# EAGLE board ANAL_4_RELAY_REV_1_1 (EAGLE 8.6.3)
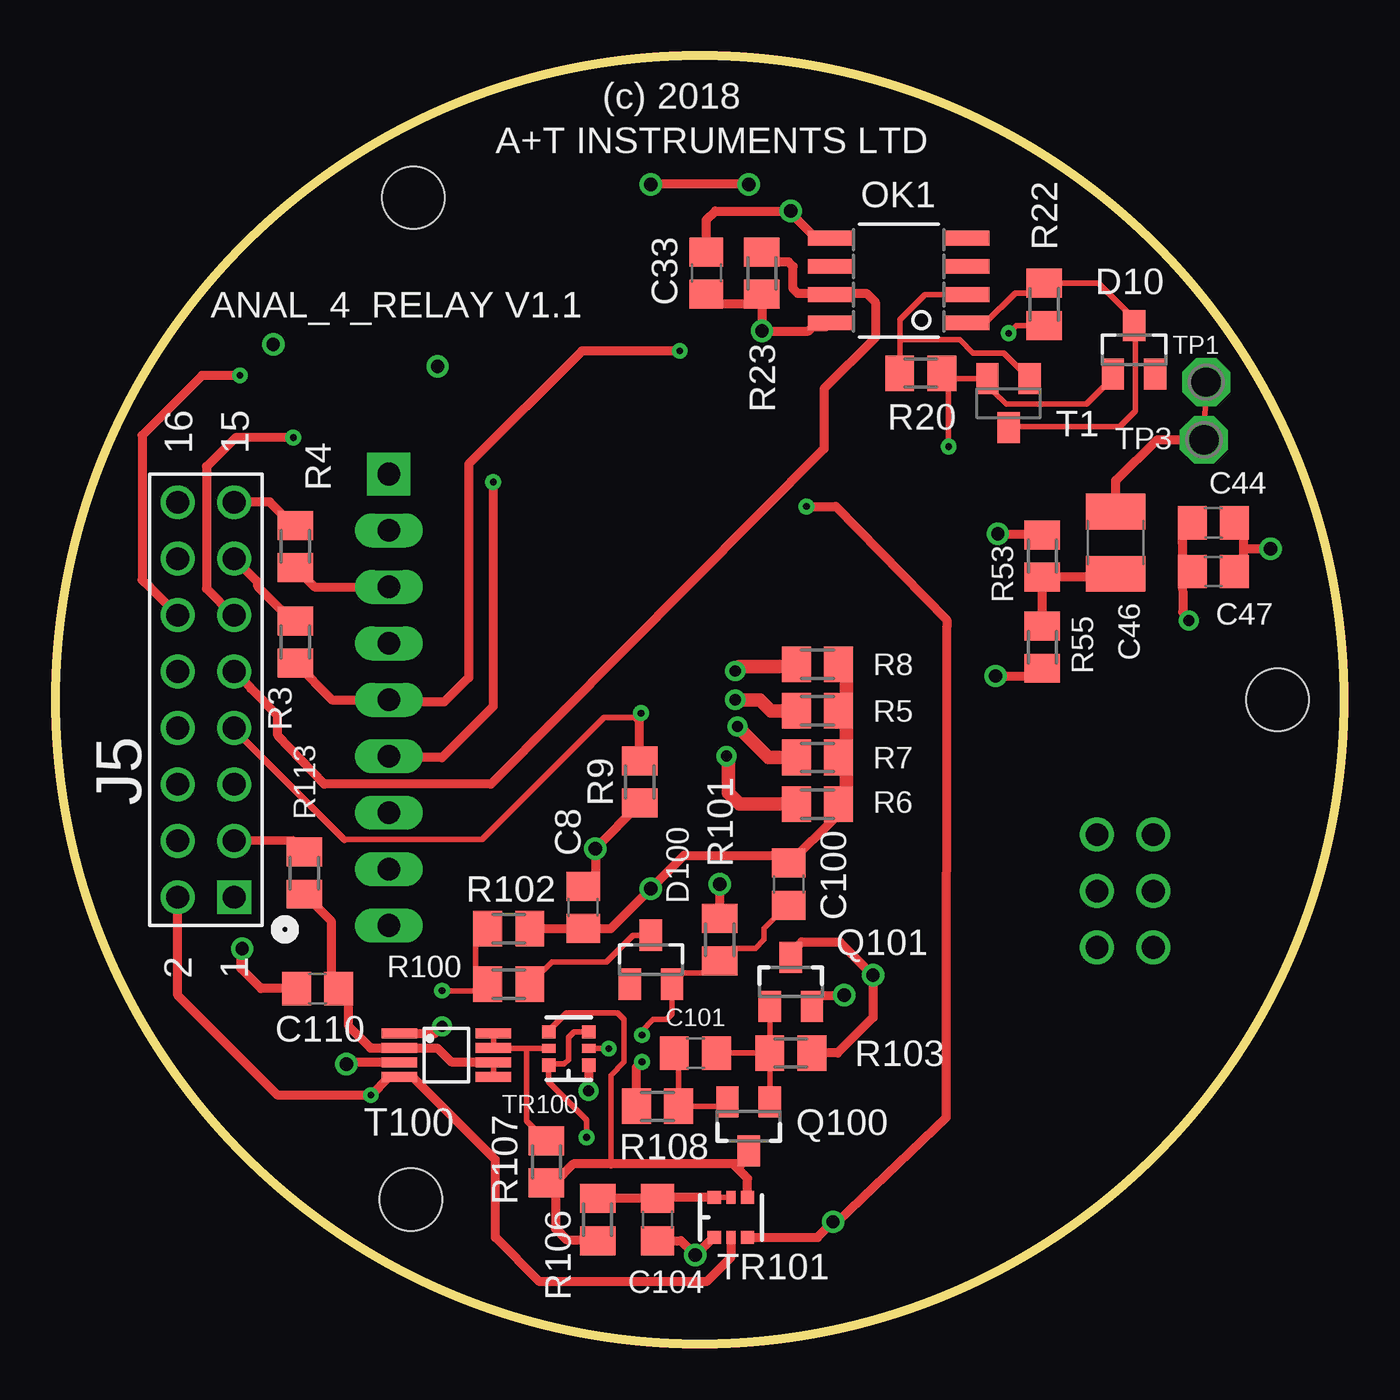
[diagram p0: board, top side]
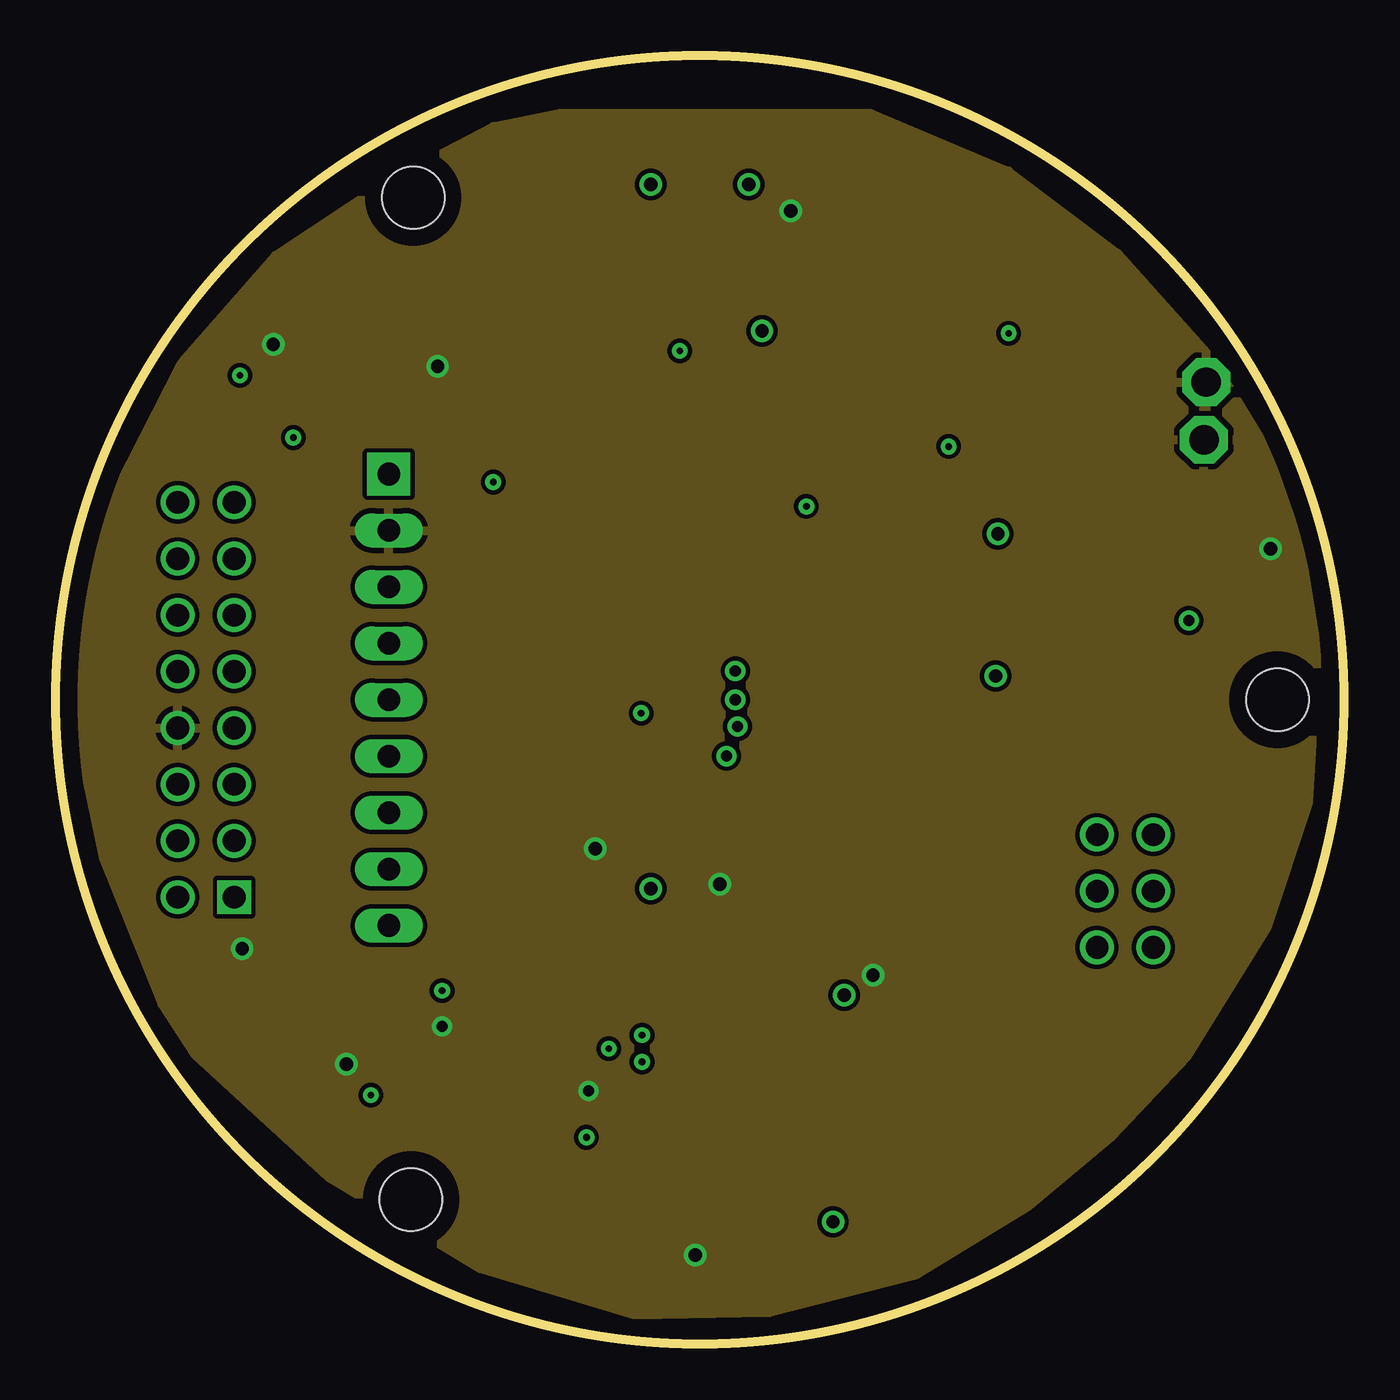
[diagram p1: board, inner layer GND]
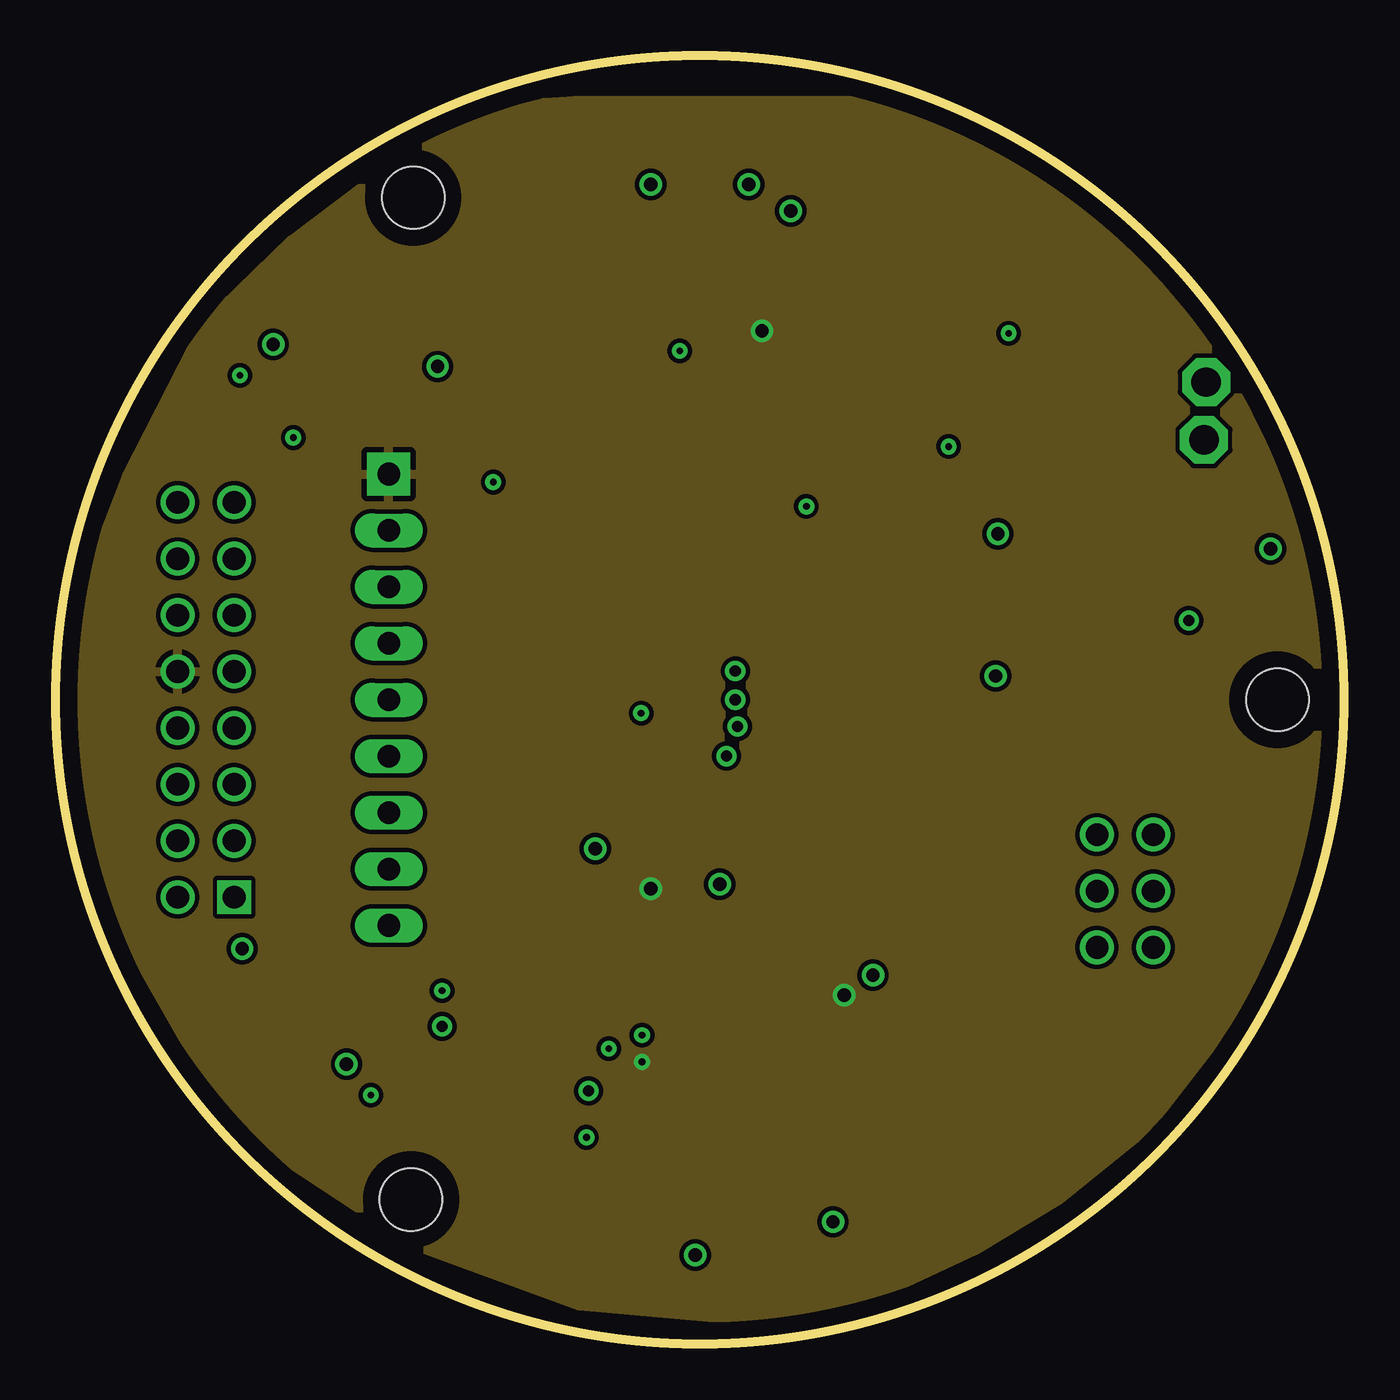
[diagram p2: board, inner layer 3V3&5V]
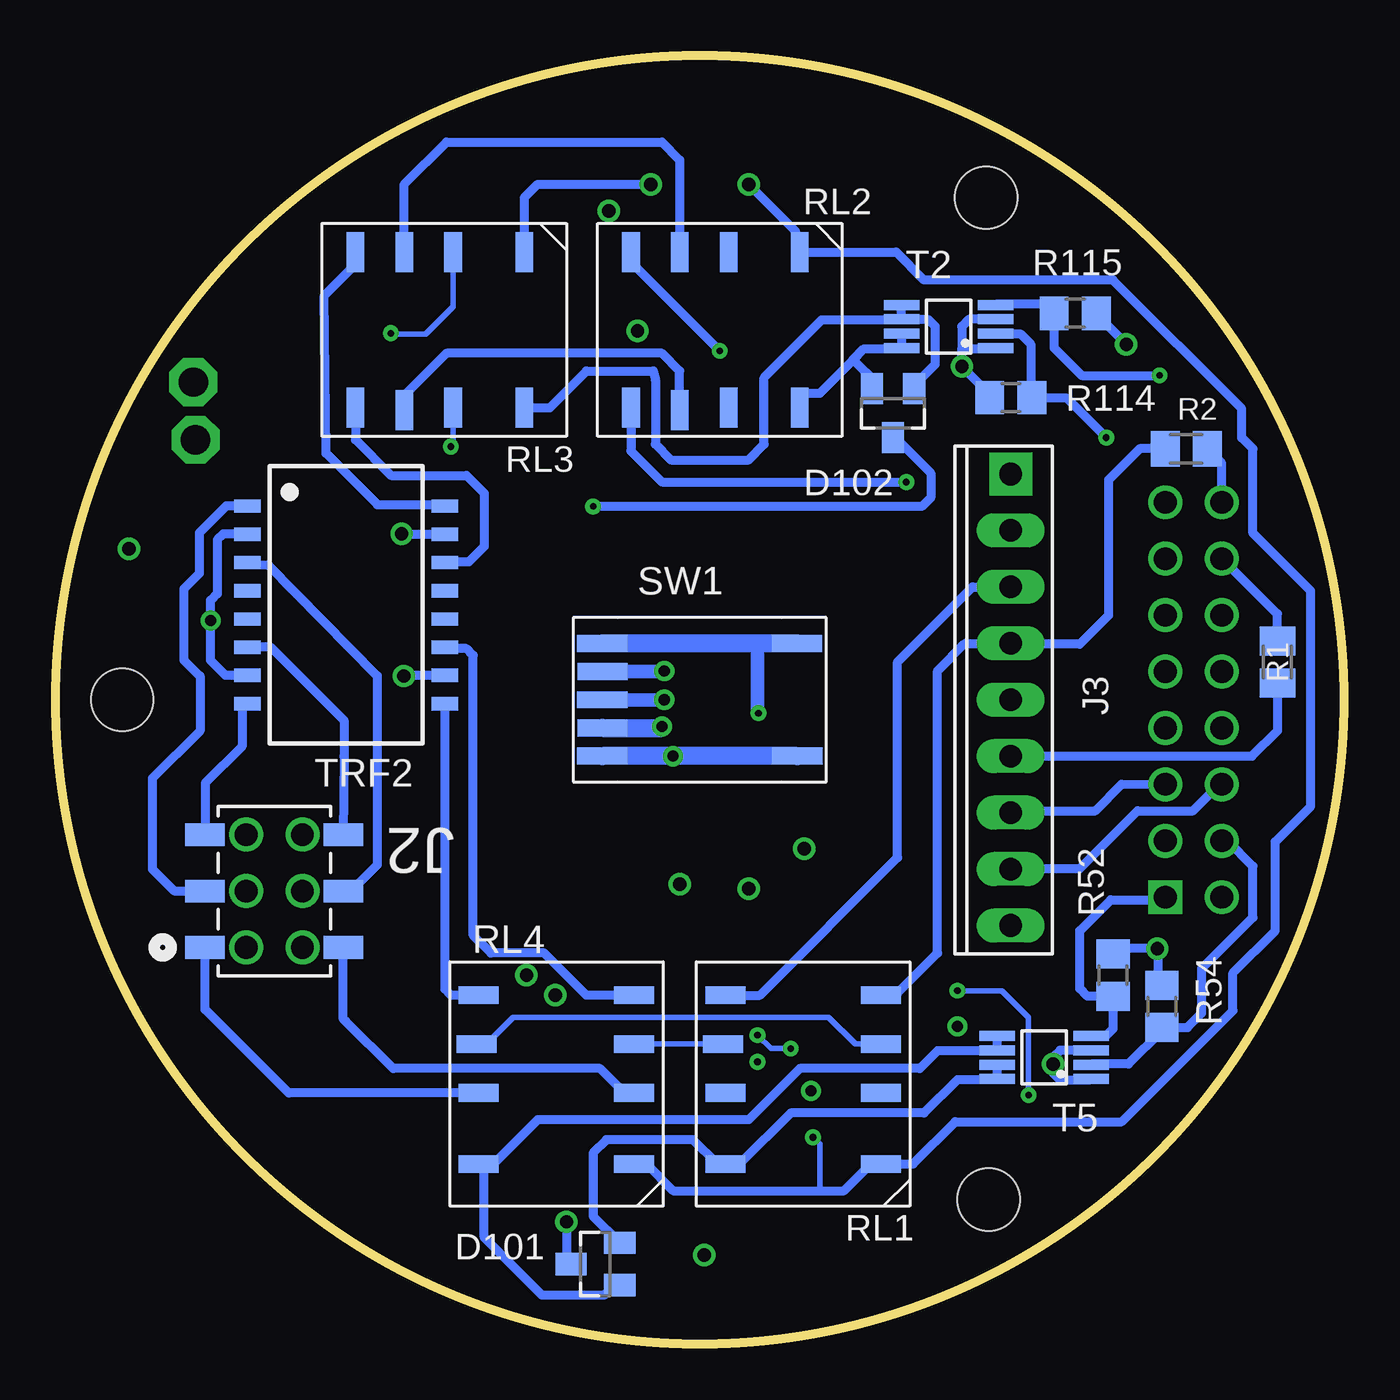
[diagram p3: board, bottom side, seen from below]

Size 58 x 58 mm. Coordinates in mm from the lower left corner, seen from the top.
Outline: circle at 29,29 radius 29
Copper layers (1*2*15*16): Top-VerticalRoutes 0.035mm / dielectric 0.5mm / GND 0.035mm / dielectric 0.5mm / 3V3&5V 0.035mm / dielectric 0.5mm / BottomnHorizontalroutes 0.035mm
Design rules "default *": minimum track width 0.2mm, minimum drill 0.3mm, track to track 6mil, track to pad 6mil, pad to pad 6mil, via to via 6mil, smd to smd 6mil, copper to edge 30mil, drill to drill 8mil, minimum pad ring 10mil, minimum via ring 8mil, stop-mask expansion 4mil, vias tented up to drill 0.31mm, thermal gap 10mil
Net classes: 0 default: width 0.2 mm, drill 0.2 mm, clearance 0.2 mm; 1 GND: width 0.2 mm, drill 0.2 mm, clearance 0.2 mm to class 0, clearance 0.2 mm; 2 5V: width 0.2 mm, drill 0.2 mm, clearance 0.2 mm to class 0, clearance 0.2 mm; 3 3v3: width 0.2 mm, drill 0.2 mm, clearance 0.2 mm to class 0, clearance 0.2 mm to class 1, clearance 0.2 mm to class 2, clearance 0.2 mm
Holes 2.8 mm at 55,29 16.1,51.6 16,6.5

## Footprints (pad centres in the part's own frame; a part is rotated, then mirrored left to right if it is on the bottom)
C0805 = smd 1.3 x 1.5: 1 -0.95,0; 2 0.95,0
C1210 = smd 1.6 x 2.7: 1 -1.4,0; 2 1.4,0
SOT23 = smd 1 x 1.4: 1 -0.95,-1.1; 2 0.95,-1.1; 3 0,1.1
CONN-6WAY-DV-BE = smd 1.016 x 1.778: 1 22.86,-6.223; 2 22.86,0; 3 20.32,-6.223; 4 20.32,0; 5 17.78,-6.223; 6 17.78,0 | drill 1.016: 7 22.86,-4.369; 8 22.86,-1.829; 9 20.32,-4.369; 10 20.32,-1.829; 11 17.78,-4.369; 12 17.78,-1.829
10X09MTA = drill 1.016 pad 1.93 square: 1 10.16,0 | drill 1.016 long: 2 7.62,0; 3 5.08,0; 4 2.54,0; 5 0,0; 6 -2.54,0; 7 -5.08,0; 8 -7.62,0; 9 -10.16,0
SAMTEC_TSW-108-14-L-D = drill 1.016 square: 1 -17.78,-2.54 | drill 1.016: 2 -17.78,0; 3 -15.24,-2.54; 4 -15.24,0; 5 -12.7,-2.54; 6 -12.7,0; 7 -10.16,-2.54; 8 -10.16,0; 9 -7.62,-2.54; 10 -7.62,0; 11 -5.08,-2.54; 12 -5.08,0; 13 -2.54,-2.54; 14 -2.54,0; 15 0,-2.54; 16 0,0
SOIC08 = smd 0.66 x 2.032: 1 -1.905,-3.073; 2 -0.635,-3.073; 3 0.635,-3.073; 4 1.905,-3.073; 5 1.905,3.073; 6 0.635,3.073; 7 -0.635,3.073; 8 -1.905,3.073
M0805 = smd 1.3 x 1.6: 1 -0.95,0; 2 0.95,0
R0805 = smd 1.3 x 1.5: 1 -0.95,0; 2 0.95,0
OMRON-G6K-2F = smd 0.8 x 1.8: 1 -3.6,-3.5; 2 -0.4,-3.5; 3 1.8,-3.5; 4 4,-3.5; 5 4,3.5; 6 1.8,3.6; 7 -0.4,3.5; 8 -3.6,3.5
10_WAY_ROTARY_MCR7 = smd 2.261 x 0.762: 1 -4.378,1.27; 2 -4.378,-1.27; 4_1 -4.385,-2.54; 4_2 4.385,-2.54; 8 -4.385,0; C1 -4.385,2.54; C2 4.378,2.54
SOT23-BEC = smd 1 x 1.4: B -0.95,-1.1; C 0,1.1; E 0.95,-1.1
SOP65P490X110-8L40N = smd 0.45 x 1.59: 1 -0.975,-2.115; 2 -0.325,-2.115; 3 0.325,-2.115; 4 0.975,-2.115; 5 0.975,2.115; 6 0.325,2.115; 7 -0.325,2.115; 8 -0.975,2.115
P1-13 = drill 1.321 pad 2.159 octagon: TP 0,0
SOT363(SC-88) = smd 0.6 x 0.6: 1 -0.9,0.75; 3 -0.9,-0.75; 4 0.9,-0.75; 6 0.9,0.75 | smd 0.6 x 0.4: 2 -0.9,0; 5 0.9,0
N5 = smd 0.6 x 1.2: 1 -4.445,-4.445; 2 -3.175,-4.445; 3 -1.905,-4.445; 4 -0.635,-4.445; 5 0.635,-4.445; 6 1.905,-4.445; 7 3.175,-4.445; 8 4.445,-4.445; 9 4.445,4.445; 10 3.175,4.445; 11 1.905,4.445; 12 0.635,4.445; 13 -0.635,4.445; 14 -1.905,4.445; 15 -3.175,4.445; 16 -4.445,4.445

## Placement (x,y rotation side)
C8  1u  [C0805]  23.75,19.65 90 top
C33  100n  [C0805]  29.3,48.2 90 top
C44  10n  [C0805]  52.12,36.97 0 top
C46  1n 2kV  [C1210]  47.72,36.07 90 top
C47  10n  [C0805]  52.12,34.77 0 top
C100  1u  [C0805]  33,20.7 270 top
C101  10N  [C0805]  28.8,13.1 0 top
C104  1u  [C0805]  27.1,5.6 270 top
C110  100n  [C0805]  11.8,16 180 top
D10  BAV199  [SOT23]  48.55,44.75 0 top
D100  BAT54A  [SOT23]  26.8,17.3 0 top
D101  BAT54A  [SOT23]  33.7,3.6 90 bottom
D102  BAT54A  [SOT23]  20.3,41.9 180 bottom
E$1  [PASS-ROUND]  -6,29 0 top  (outside the outline)
E$2  [PASS-ROUND]  29.4,63.7 0 top  (outside the outline)
E$3  [PASS-ROUND]  64.05,29 0 top  (outside the outline)
J2  TE 969973-3  [CONN-6WAY-DV-BE]  45.05,40.71 270 bottom
J3  B06-1X9-AG1-G  [10X09MTA]  15,29 90 bottom
J5  TSW-108-15-F-D  [SAMTEC_TSW-108-14-L-D]  5.5,37.89 90 top
OK1  HCPL0530  [SOIC08]  37.96,47.87 90 top
Q100  NTR2101P  [SOT23]  31.2,9.8 180 top
Q101  BC807  [SOT23]  33.1,16.3 0 top
R1  100k_0.1%  [M0805]  3,30.7 270 bottom
R2  100k_0.1%  [M0805]  7.1,40.3 180 bottom
R3  100k_0.1%  [M0805]  10.8,31.6 90 top
R4  100k_0.1%  [M0805]  10.8,35.9 90 top
R5  1k  [M0805]  34.3,28.5 0 top
R6  2k  [M0805]  34.3,24.3 0 top
R7  4k02  [M0805]  34.3,26.4 0 top
R8  8k06  [M0805]  34.3,30.6 0 top
R9  1k  [M0805]  26.3,25.3 90 top
R20  100  [M0805]  38.95,43.7 180 top
R22  680  [M0805]  44.5,46.8 90 top
R23  10K  [M0805]  31.8,48.2 270 top
R52  1M  [R0805]  10.4,16.6 270 bottom
R53  75R  [M0805]  44.42,35.47 270 top
R54  1M  [R0805]  8.2,15.2 270 bottom
R55  75R  [M0805]  44.42,31.37 90 top
R100  10k  [M0805]  20.4,16.2 0 top
R101  10k  [M0805]  29.9,18.2 270 top
R102  100k  [M0805]  20.4,18.7 0 top
R103  10k  [M0805]  33.1,13.1 180 top
R106  10k  [M0805]  24.4,5.6 270 top
R107  10k  [M0805]  22.1,8.2 270 top
R108  5R6  [M0805]  27.1,10.7 180 top
R113  10k  [M0805]  11.2,21.2 90 top
R114  1M  [R0805]  15,42.6 0 bottom
R115  1M  [R0805]  12.1,46.4 180 bottom
RL1  OMRON-G6K-2FY-5VDC  [OMRON-G6K-2F]  24.35,11.7 90 bottom
RL2  OMRON-G6K-2FY-5VDC  [OMRON-G6K-2F]  28.1,45.65 180 bottom
RL3  OMRON-G6K-2FY-5VDC  [OMRON-G6K-2F]  40.5,45.65 180 bottom
RL4  OMRON-G6K-2FY-5VDC  [OMRON-G6K-2F]  35.45,11.7 90 bottom
SW1  MCR7M4-10RA-V-B  [10_WAY_ROTARY_MCR7]  29,29 0 bottom
T1  BC817  [SOT23-BEC]  42.9,42.35 180 top
T2  ZXMD63N03X  [SOP65P490X110-8L40N]  17.8,45.8 90 bottom
T5  ZXMD63N03X  [SOP65P490X110-8L40N]  13.5,12.9 90 bottom
T100  ZXMD63N03X  [SOP65P490X110-8L40N]  17.6,13 270 top
TP1  PTR1PAD1-13  [P1-13]  51.8,43.3 0 top
TP3  PTR1PAD1-13  [P1-13]  51.7,40.7 0 top
TR100  NX3008CBKS  [SOT363(SC-88)]  23.1,13.3 180 top
TR101  NX3008CBKS  [SOT363(SC-88)]  30.4,5.7 90 top
TRF2  HX1188NL  [N5]  44.92,33.27 270 bottom

## Library data of the parts
C8 C33 C44 C46 C47 C100 C101 C104 C110 R1-R9 R20 R22 R23 R53 R55 R100-R103 R106-R108 R113 = rcl
D10 D100-D102 = diode
E$1-E$3 = marks
J2 = AWR; MOUSER: 969973-3; PARTNUMBER: TE 969973-3
J3 = con-amp
J5 = AWR; MPN: TSW-108-15-F-D; OC_FARNELL: 2027309; PACKAGE: Post header-16Pin; SUPPLIER: Samtec
OK1 = Opto_AandT; FARNELL: 9995161; MF: FAIRCHILD SEMICONDUCTOR; MPN: HCPL0530; PACKAGE: SOIC-8
Q100 = Transistor_AandT; FARNELL: 1431297; MANUFACTURER: ON-SEMI; MPN: NTR2101P; PACKAGE: SOT23; RS: 780-4739 PK25
Q101 = Transistor_AandT; FARNELL: 1081221; MANUFACTURER: NXP; MARKING: 5B*; MOQ-FARNELL: 10; MPN: BC807-25; PACKAGE: SOT-23
R52 R54 R114 R115 = resistor
RL1-RL4 = Magnetics_AandT; FARNELL: 4446239
SW1 = AWR; FARNELL: 2083032; PART_NO: Multicomp MCR7M4-10RA-V-B
T1 = transistor
T2 T5 T100 = zetex
TP1 TP3 = testpad
TR100 TR101 = Transistor_AandT; MANUFACTURER: NXP; MARKING: LD%; MPN: NX3008CBKS; PACKAGE: SOT-363
TRF2 = Magnetics_AandT

## Nets
+5V [5V]: C8.1 C33.1 C100.1 J3.1 J5.10 OK1.8 Q101.2 R5.2 R6.2 R7.2 R8.2 R23.2 R102.2 R108.2
AN0: J3.3 R4.1 RL1.5
AN1: J3.4 R2.2 RL1.4
COMMSA: J2.2 RL4.2
COMMSB: J2.1 RL4.7
ETHRX+: RL3.5 TRF2.14
ETHRX-: RL3.4 TRF2.16
ETHTX+: RL4.5 TRF2.9
ETHTX-: RL4.4 TRF2.11
GND [GND]: C8.2 C33.2 C44.2 C46.2 C47.2 C104.2 C110.2 J3.2 J5.8 OK1.5 Q101.3 R9.1 R52.1 R54.1 R101.1 R103.1 R114.1 R115.1 T2.1 T2.3 T5.1 T5.3 T100.1 T100.3 TP1.TP TP3.TP TR100.1 TR101.1
HI-2-SET-RELAYS: J5.3 R113.2
HI-4-RELAY-RESET: J5.2 R100.1 R102.1 T100.4 TR101.2
LIM5V [5V]: Q100.3 R106.2 R107.2 TR100.4 TR101.4
N$1: J5.14 R1.1
N$2: J5.16 R2.1
N$3: J5.13 R3.2
N$4: J5.15 R4.2
N$7: R5.1 SW1.8
N$8: R6.1 SW1.4_1 SW1.4_2
N$10: R8.1 SW1.1
N$11: R7.1 SW1.2
N$19: OK1.2 R20.2 T1.B
N$57: D102.1 RL3.8 T2.5 T2.6
N$67: C46.1 R53.2 R55.2
N$72: R53.1 TRF2.15
N$73: R55.1 TRF2.10
N$74: D101.1 RL4.8 T5.5 T5.6
N$75: D102.2 RL2.8 T2.7 T2.8
N$76: RL1.6 RL4.3
N$78: RL1.3 RL4.6
N$80: C44.1 C47.1 TRF2.2 TRF2.7
N$81: D101.2 RL1.8 T5.7 T5.8
N$83: RL2.3 RL3.3
N$84: RL2.6 RL3.6
N$85: C100.2 D100.2 R101.2 TR100.2
N$86: C104.1 R106.1 TR101.5 TR101.6
N$87: D101.3 D102.3 TR101.3
N$88: D100.3 R100.2
N$92: R107.1 T100.7 T100.8 TR100.5
N$95: C101.1 Q100.2 R108.1
N$96: D10.3 OK1.1 R22.2 T1.C
N$97: C101.2 Q100.1 Q101.1 R103.2
NMEA1: J5.9 OK1.7 R23.1
NMEA-IN-A: J3.5 R3.1 RL2.4
NMEA-IN-B: J3.6 R1.2 RL2.5
NMEA-OUT-A: J3.7 J5.5
NMEA-OUT-B: J3.8 J5.6
NMEAA: R22.1 RL3.2
NMEAB: D10.1 R20.1 RL3.7 T1.E
RB8: J5.11 R114.2 T2.2
RB9: J5.4 R54.2 T5.2
RB10: J5.12 R115.2 T2.4
RB11: J5.1 R52.2 T5.4
RELAY-TOPS [5V]: RL1.1 RL2.1 RL3.1 RL4.1 TR100.3 TR100.6
ROTARY_SWITCH: J5.7 R9.2 SW1.C1 SW1.C2
SHOOT-THRU-INHIBIT: C110.1 R113.1 T100.2 T100.5 T100.6
TPIN+: J2.4 TRF2.3
TPIN-: J2.3 TRF2.1
TPOUT+: J2.5 TRF2.8
TPOUT-: J2.6 TRF2.6

## Tracks (layer width: path | path; a pad name or v marks a point on that pad's centre or on a via)
+5V  (via drill 0.3, 0.6)
  Top-VerticalRoutes 0.254: 35.6,30.9 35.45,30.9 R8.2 | C100.1 33.05,21.65
  Top-VerticalRoutes 0.406: C33.1 29.75,46.8 31.4,46.8 31.8,47.2 R23.2 v31.8,45.6 33.9,45.6 34.1,45.8 34.72,45.8 OK1.8 | R102.2 C8.1 25,18.7 v26.8,20.5 28.3,22 32.65,22 C100.1 | Q101.2 34.05,15.45 34.3,15.7 v35.5,15.7 | R108.2 26.15,12.45 v26.4,12.7 | 33.05,21.65 35.1,23.7 35.1,24.15 R6.2
  Top-VerticalRoutes 0.61: R6.2 35.25,24.35 35.6,24.7 35.6,26.05 R7.2 35.5,26.4 35.6,26.3 35.6,28.15 R5.2 35.6,28.5 35.6,30.25 R8.2
  pour 3V3&5V: 23.4,56 36.5,56 42.5,53.6 48,49.6 52.4,44.4 55.6,37.9 56.9,31.3 56.9,26.7 55.9,21 54.2,16.7 51.9,13.2 49.2,9.7 45.2,6.5 41.4,4.2 36.5,1.9 30.4,1.1 23.6,1.7 16.2,4.4 10.3,8.3 6.7,12.1 3.5,17.7 1.2,24.2 1.1,33.7 3.2,39.1 6.7,45.9 10.6,49.7 15.1,53.1 18.9,55.1 22,55.9
AN0
  Top-VerticalRoutes 0.406: R4.1 11.67,34.08 J3.3
  BottomnHorizontalroutes 0.406: RL1.5 26.3,15.7 20.1,21.9 20.1,30.7 16.72,34.08 J3.3
AN1
  BottomnHorizontalroutes 0.406: RL1.4 20.75,15.8 20.1,15.8 18.3,17.6 18.3,30.3 17.1,31.5 17.08,31.5 17.04,31.54 J3.4 14.96,31.5 11.9,31.5 10.6,32.8 10.6,38.9 9.2,40.3 R2.2
COMMSA
  BottomnHorizontalroutes 0.406: RL4.2 32.15,11.5 32.6,11.5 33.5,12.4 42.8,12.4 44.93,14.53 45.05,14.63 J2.2
COMMSB
  BottomnHorizontalroutes 0.406: RL4.7 47.5,11.3 51.25,15.05 51.27,15.05 J2.1
ETHRX+
  BottomnHorizontalroutes 0.406: RL3.5 44.5,40.7 42.9,39.1 39.5,39.1 38.7,38.3 38.7,35.9 39.4,35.2 40.45,35.2 TRF2.14
ETHRX-
  BottomnHorizontalroutes 0.406: RL3.4 44.7,48.95 44.7,48.4 45.9,47.2 45.82,40.1 43.52,37.8 43.52,37.77 41.02,37.77 TRF2.16
ETHTX+
  BottomnHorizontalroutes 0.406: 40.62,28.88 40.52,28.78 TRF2.9 40.47,15.98 40.2,15.7 RL4.5
ETHTX-
  BottomnHorizontalroutes 0.406: TRF2.11 40.41,31.3 39.5,31.3 39.2,31 39.2,18.4 38.4,17.6 36,17.6 34.1,15.7 RL4.4
GND  (via drill 0.5, 0.6)
  Top-VerticalRoutes 0.254: TP3.TP TP1.TP
  Top-VerticalRoutes 0.406: TR101.1 28.95,4.15 v28.8,4 28.15,4.65 C104.2 | C33.2 29.3,50.6 29.7,51 v33.1,51 | v33.1,51 33.2,51 | v33.1,51 33.1,50.9 34.2,49.8 34.86,49.8 OK1.5 | R103.1 35.2,13.1 36.8,14.7 v36.8,16.6 35.3,18.1 33.6,18.1 33.1,17.6 Q101.3 | C8.2 24.15,21.05 24.3,21.2 v24.3,22.3 26.3,24.3 R9.1 | R101.1 v29.9,20.7 | TR100.1 v24,11.4 | T100.3 13.17,12.68 v13.1,12.6 | T100.1 17.08,13.97 v17.4,14.3 | 53.07,34.82 C47.2 53.07,34.87 53.5,35.3 53.5,35.8 | C46.2 47.72,38.87 49.6,40.7 TP3.TP | 53.5,35.8 53.5,36.54 | 53.5,36.54 C44.2 53.23,36.97 53.5,36.7 53.5,36.54 | 53.5,35.8 v54.7,35.8 | C110.2 9.25,16 8.35,16.9 8.35,17.75 v8.4,17.8
  BottomnHorizontalroutes 0.406: R54.1 8.35,16.15 8.35,17.85 8.4,17.9 v8.4,17.8 10.15,17.8 R52.1 9.95,17.1 | T5.3 12.77,13.22 13.1,12.9 v13.1,12.6 13.1,12.2 12.8,11.9 11.41,11.9 T5.1 | T2.3 16.88,46.12 17.2,45.8 17.2,44.8 | 17.2,44.8 15.71,44.8 T2.1 | R114.1 15.95,42.75 v17.2,44 17.2,44.8 | R115.1 11.15,46.35 v9.8,45
  pour GND: 22.7,55.4 36.7,55.4 42.9,52.8 47.8,49.1 52,44.4 54.5,40.3 56,36 56.8,31.1 56.4,24.4 54.5,18.7 50.9,12.9 47.5,9.3 43.8,6.2 38.7,3.1 32.1,1.4 26.1,1.3 19.1,3.4 12.3,7.5 6.3,13 4.8,15.3 2.2,21.8 1.2,26.5 1.1,33.4 2.8,38.5 5.7,44.2 9.9,49 14.9,52.3 19.7,54.8
HI-2-SET-RELAYS
  Top-VerticalRoutes 0.406: R113.2 10.69,22.66 J5.3
HI-4-RELAY-RESET  (via drill 0.3)
  Top-VerticalRoutes 0.254: 16.1,12 15,12 | v17.4,15.9 19.4,15.9 19.45,15.95 R100.1 18.9,16.75 18.9,18.5 19.1,18.7 R102.1
  Top-VerticalRoutes 0.406: TR101.2 30.4,3.9 29.3,2.8 21.8,2.8 19.8,4.8 19.8,8.3 16.1,12 15.51,12 T100.4 15.03,12.03 15,12 v14.2,11.2 10,11.2 5.5,15.7 J5.2
  BottomnHorizontalroutes 0.254: v14.2,11.2 14.2,14.7 15.4,15.9 v17.4,15.9
LIM5V
  Top-VerticalRoutes 0.254: 22.25,14 TR100.4 22.2,14.1 23,14.9 25.3,14.9 25.6,14.6 25.6,12.7 25,12.1 25,8.1
  Top-VerticalRoutes 0.406: TR101.4 31.15,7.45 30.5,8.1 | 30.5,8.1 25,8.1 23.3,8.1 22.5,7.3 | 22.5,7.3 22.5,5.2 23,4.7 24.35,4.7 R106.2 | 30.5,8.1 30.9,8.1 Q100.3 | R107.2 22.45,7.25 22.5,7.3
N$1
  BottomnHorizontalroutes 0.406: R1.1 3,32.86 J5.14
N$2
  BottomnHorizontalroutes 0.406: J5.16 5.5,39.65 R2.1
N$3
  Top-VerticalRoutes 0.406: R3.2 10.65,32.55 9.1,34.1 9.1,34.3 J5.13
N$4
  Top-VerticalRoutes 0.406: R4.2 10.75,36.8 9.65,37.9 J5.15
N$5
  cutout GND: 51.3,41.8 50.7,41.2 50.7,40.2 51.3,39.7 52.1,39.7 52.8,40.2 52.8,41 52.1,41.6 51.9,41.8
N$7  (via drill 0.5)
  Top-VerticalRoutes 0.61: R5.1 32.2,28.5 31.7,29 v30.6,29
  BottomnHorizontalroutes 0.61: v30.6,29 SW1.8
N$8  (via drill 0.5)
  Top-VerticalRoutes 0.61: v30.2,26.46 30.3,26.46 30.3,24.8 30.8,24.3 R6.1
  BottomnHorizontalroutes 0.813: SW1.4_2 v30.2,26.46 SW1.4_1
N$10  (via drill 0.5)
  Top-VerticalRoutes 0.61: v30.6,30.3 30.8,30.5 33.15,30.5 R8.1
  BottomnHorizontalroutes 0.61: SW1.1 30.63,30.27 v30.6,30.3
N$11  (via drill 0.5)
  Top-VerticalRoutes 0.61: v30.7,27.8 32.1,26.4 R7.1
  BottomnHorizontalroutes 0.813: SW1.2 30.7,27.73 v30.7,27.8
N$19
  Top-VerticalRoutes 0.254: OK1.2 39.14,47.23 38,46.1 38,45.1 | 38,45.1 R20.2 | T1.B 42.7,44.6 41.3,44.6 40.7,45.2 38.1,45.2 38,45.1
N$57
  BottomnHorizontalroutes 0.406: RL3.8 35.75,42.15 34.1,43.8 31.1,43.8 31,43.4 31,40.5 30.3,39.8 26.8,39.8 26.1,40.5 26.1,43.5 23.5,46.1 19.79,46.1 T2.6 | T2.6 T2.5 | D102.1 19.15,43.35 18.4,44.1 18.4,45.8 18.7,46.1 19.89,46.1 T2.6
N$67
  Top-VerticalRoutes 0.406: R55.2 44.67,32.32 44.87,32.52 44.42,32.47 R53.2 47.68,34.52 47.7,34.5 47.49,34.5 47.42,34.57 47.62,34.57 C46.1
N$72  (via drill 0.6)
  Top-VerticalRoutes 0.406: v42.42,36.47 44.37,36.47 R53.1
  BottomnHorizontalroutes 0.406: TRF2.15 42.39,36.45 v42.42,36.47
N$73  (via drill 0.6)
  Top-VerticalRoutes 0.406: v42.32,30.07 44.07,30.07 R55.1
  BottomnHorizontalroutes 0.406: TRF2.10 42.3,30.09 v42.32,30.07
N$74
  BottomnHorizontalroutes 0.254: RL4.8 38.2,8.2 | T5.6 T5.5
  BottomnHorizontalroutes 0.406: T5.5 T5.6 15.6,13.2 18.3,13.2 19.1,12.4 24.5,12.4 26.8,10.1 36.3,10.1 38.2,8.2 | D101.1 32.85,2.65 33.3,2.2 36.1,2.2 38.7,4.8 38.7,7.85 RL4.8
N$75
  BottomnHorizontalroutes 0.406: T2.7 T2.8 19.94,44.8 21.6,44.8 22.08,44.32 22.08,44.3 | D102.2 21.05,43.27 22.08,44.3 | 22.08,44.3 22.1,44.3 23.6,42.8 24.5,42.8 RL2.8
N$76
  BottomnHorizontalroutes 0.254: RL1.6 RL4.3
N$78
  BottomnHorizontalroutes 0.254: RL1.3 22,13.5 23.2,14.7 37.4,14.7 38.5,13.6 38.95,13.6 RL4.6
N$80  (via drill 0.5)
  Top-VerticalRoutes 0.406: 50.77,36.92 50.72,36.07 | 50.72,36.07 50.72,36.72 C44.1 | 50.72,36.07 50.72,34.87 | 50.72,34.87 50.74,32.95 v51.02,32.57 | C47.1 50.82,34.77 50.72,34.87
  BottomnHorizontalroutes 0.406: TRF2.2 49.94,36.47 50.45,36.47 50.72,36.2 50.72,33.77 51.02,33.47 v51.02,32.57 51.02,30.77 50.34,30.09 TRF2.7
N$81
  BottomnHorizontalroutes 0.406: D101.2 33.8,5.75 33.8,8.6 33.2,9.2 29.3,9.2 28.2,8.1 RL1.8 27.2,8.1 24.9,10.4 18.9,10.4 17.4,11.9 15.6,11.9 15.61,11.91 T5.8 T5.7
N$83
  BottomnHorizontalroutes 0.254: 42.3,49.7 RL3.3
  BottomnHorizontalroutes 0.406: RL3.3 42.3,52.2 40.4,54.1 30.7,54.1 29.9,53.3 29.9,50.1 29.85,49.15 RL2.3
N$84
  BottomnHorizontalroutes 0.254: RL2.6 29.9,42.5 | 42.4,42.6 42.4,42.4 42.3,42.4 RL3.6
  BottomnHorizontalroutes 0.406: 29.9,42.5 29.9,43.8 30.7,44.6 40.4,44.6 42.4,42.6
N$85  (via drill 0.3)
  Top-VerticalRoutes 0.254: TR100.2 v24.9,13.3 | v26.4,13.9 26.4,14.1 26.9,14.6 27.5,14.6 27.75,14.85 D100.2 28.25,16.7 29.6,16.7 29.9,17 R101.2 30.45,17.8 31.5,17.8 31.9,18.2 31.9,18.7 32.95,19.75 C100.2
  BottomnHorizontalroutes 0.254: v24.9,13.3 25.8,13.3 v26.4,13.9
N$86
  Top-VerticalRoutes 0.254: TR101.5 TR101.6
  Top-VerticalRoutes 0.406: TR101.6 27.15,6.6 C104.1 R106.1
N$87  (via drill 0.3, 0.6)
  Top-VerticalRoutes 0.406: TR101.3 34.3,4.8 v35,5.5 35.2,5.5 40.1,10.2 40.12,32.27 40.12,32.6 35.12,37.7 v33.8,37.7
  BottomnHorizontalroutes 0.406: v35,5.5 35,3.7 D101.3 | D102.3 20.1,40.7 18.6,39.2 18.6,38.1 19,37.7 v33.8,37.7
N$88
  Top-VerticalRoutes 0.254: R100.2 22.35,17.2 24.8,17.2 26,18.4 D100.3
N$92
  Top-VerticalRoutes 0.254: T100.7 T100.8 | 19.74,13.3 21.2,13.3 | 21.2,13.3 TR100.5 | R107.1 21.2,10.05 21.2,13.3
  Top-VerticalRoutes 0.406: T100.8 19.72,13.98 19.7,14 | T100.7 19.74,13.3
N$95
  Top-VerticalRoutes 0.254: Q100.2 30.05,10.7 R108.1 28.05,12.9 C101.1
N$96
  Top-VerticalRoutes 0.254: OK1.1 41.86,45.97 43.2,47.3 44.05,47.3 R22.2 46.95,47.75 48.5,46.2 48.5,46 D10.3 48.6,45.8 48.6,42 47.9,41.3 43.3,41.3 42.85,41.25 T1.C
N$97
  Top-VerticalRoutes 0.254: C101.2 R103.2 | Q101.1 R103.2 | Q100.1 R103.2
NMEA1
  Top-VerticalRoutes 0.406: 34.87,47.25 OK1.7 34.82,47.3 | R23.1 32.25,48.7 33,48.7 33.2,48.5 33.2,47.5 33.4,47.3 34.82,47.3 | 34.82,47.3 36.5,47.3 36.9,46.9 36.9,45.3 34.6,43 34.6,40.3 19.6,25.2 12.1,25.2 10,27.4 10,28.3 8.8,29.5 8.8,29.52 J5.9
NMEA-IN-A  (via drill 0.3)
  Top-VerticalRoutes 0.406: R3.1 12.45,29 14.5,29 | 14.5,29 J3.5 | v28.1,44.7 23.7,44.7 18.6,39.6 18.6,30 17.5,28.9 14.6,28.9 14.5,29
  BottomnHorizontalroutes 0.406: RL2.4 32,48.6 v28.1,44.7
NMEA-IN-B  (via drill 0.3)
  Top-VerticalRoutes 0.406: v19.7,38.8 19.7,28.7 17.4,26.4 15.06,26.4 J3.6
  BottomnHorizontalroutes 0.406: RL2.5 32.1,40.2 30.7,38.8 v19.7,38.8 | J3.6 4.14,26.46 3,27.6 R1.2
NMEA-OUT-A
  BottomnHorizontalroutes 0.406: J3.7 14.92,24 11.2,24 10,25.2 J5.5
NMEA-OUT-B
  BottomnHorizontalroutes 0.406: J3.8 14.98,21.4 11.9,21.4 9.3,24 6.8,24 5.6,25.2 J5.6
NMEAA  (via drill 0.3)
  Top-VerticalRoutes 0.254: R22.1 43.25,45.85 v42.9,45.5
  BottomnHorizontalroutes 0.254: RL3.2 40.1,46.7 41.35,45.45 42.85,45.45 v42.9,45.5
NMEAB  (via drill 0.3)
  Top-VerticalRoutes 0.254: D10.1 47.55,43.45 46.4,42.3 42.8,42.3 42.2,42.9 42.2,43.2 T1.E 40.15,43.45 R20.1 40.2,43.4 v40.2,40.4
  BottomnHorizontalroutes 0.254: RL3.7 40.1,40.2 v40.2,40.4
RB8  (via drill 0.3)
  Top-VerticalRoutes 0.406: v10.7,40.8 8.1,40.8 6.8,39.5 6.8,34 7.98,32.82 J5.11
  BottomnHorizontalroutes 0.406: T2.2 14.58,45.48 14.1,45 14.1,42.65 R114.2 12.5,42.6 v10.7,40.8
RB9
  BottomnHorizontalroutes 0.406: T5.2 11.36,12.6 9.7,12.6 8.2,14.1 R54.2 7.05,14.25 6.4,14.9 6.4,16.9 4.1,19.2 4.1,21.5 5.26,22.66 J5.4
RB10  (via drill 0.3)
  Top-VerticalRoutes 0.406: v8.3,43.6 6.6,43.6 3.9,40.9 3.9,34.4 4.22,34.1 J5.12
  BottomnHorizontalroutes 0.406: T2.4 15.66,46.8 13.5,46.8 13.1,46.4 R115.2 13.05,44.85 11.8,43.6 v8.3,43.6
RB11
  BottomnHorizontalroutes 0.406: T5.4 10.7,13.88 10.7,13.9 10.4,14.19 R52.2 11.55,15.65 11.9,16 11.9,18.6 10.5,20 8.16,20 J5.1
RELAY-TOPS  (via drill 0.3, 0.6)
  Top-VerticalRoutes 0.254: v23.9,9.3 23.9,10.1 22.2,11.8 TR100.6 22.25,12.6 22.9,12.6 23.1,12.8 23.1,13.8 23.35,14.05 TR100.3
  Top-VerticalRoutes 0.406: v31.2,52.2 v26.8,52.2
  BottomnHorizontalroutes 0.254: 31.4,8.2 31.85,8.2 RL4.1 31.5,8.1 | 21.3,8.1 RL1.1 20.7,8.1 | v23.9,9.3 23.6,9 23.6,6.9
  BottomnHorizontalroutes 0.406: v31.2,52.2 36.3,52.2 36.9,51.6 RL3.1 | v26.8,52.2 24.7,50.1 24.7,49.5 24.5,49.6 RL2.1 | 24.5,49.1 RL2.1 | 31.4,8.2 31.4,8.1 30.2,6.9 23.6,6.9 22.5,6.9 21.4,8 20.95,8 RL1.1 19.4,8.1 17.5,10 10,10 5,15 5,16.7 3.1,18.6 3.1,22.6 1.5,24.2 1.5,33.9 4.1,36.5 4.1,40.3 4.6,40.8 4.6,42.1 10.4,47.9 18.9,47.9 20.15,49.15 RL2.1
ROTARY_SWITCH  (via drill 0.3)
  Top-VerticalRoutes 0.254: 13,22.7 19.2,22.7 24.7,28.2 26.16,28.2
  Top-VerticalRoutes 0.305: J5.7 8.04,27.66 13,22.7
  Top-VerticalRoutes 0.406: 26.16,28.2 v26.36,28.4 26.3,28.34 R9.2
  BottomnHorizontalroutes 0.61: SW1.C2 26.36,31.54 26.4,31.5 26.4,28.44 v26.36,28.4
  BottomnHorizontalroutes 0.813: SW1.C2 SW1.C1
SHOOT-THRU-INHIBIT
  Top-VerticalRoutes 0.254: T100.5 T100.6
  Top-VerticalRoutes 0.406: T100.2 17.17,13.32 17.8,12.7 19.69,12.7 T100.6 | R113.1 12.4,19.05 12.4,16.7 13.2,15.9 | 13.2,15.9 C110.1 | T100.2 15.46,13.3 | 13.2,15.9 13.2,14.3 14.17,13.32 T100.2
TPIN+
  BottomnHorizontalroutes 0.406: TRF2.3 49.22,35.09 48.42,35.07 43.52,30.07 43.52,21.57 44.42,20.67 44.9,20.37 J2.4
TPIN-
  BottomnHorizontalroutes 0.406: TRF2.1 50.31,37.73 51.52,36.52 51.52,34.7 52.22,34 52.22,30.77 51.52,30.07 51.5,30.07 51.5,27.6 53.64,25.46 53.64,21.38 52.66,20.4 J2.3
TPOUT+
  BottomnHorizontalroutes 0.406: TRF2.8 49.6,28.59 49.6,26.9 51.25,25.25 J2.5
TPOUT-
  BottomnHorizontalroutes 0.406: TRF2.6 49.77,31.37 48.32,31.37 45.02,28.07 45.02,26.45 J2.6

## Text on the board
Top-VerticalRoutes: TOP COPPER
GND: INNER COPPER #1
3V3&5V: INNER COPPER #2
BottomnHorizontalroutes: BOTTOM COPPER
Dimension: 58mm diameter. 4 layer copper. 1mm thick FR4.
tNames: (c) 2018 | A+T INSTRUMENTS LTD | ANAL_4_RELAY V1.1 | TOP SILK
bNames: BOTTOM SILK
tStop: TOP RESIST
bStop: BOTTOM SOLDER RESIST
tCream: TOP PASTE MASK
bCream: BOTTOM PASTE MASK